# Altium PCB TK512_Optisk_Mottaker.PcbDoc
Units mm, origin at the board's own origin, x right, y up, seen from the top; angles counter-clockwise.
Board outline 41 x 28 mm, 2 copper layers (Top Layer, Bottom Layer); 19 components, 14 nets, 57 pads, 4 vias.
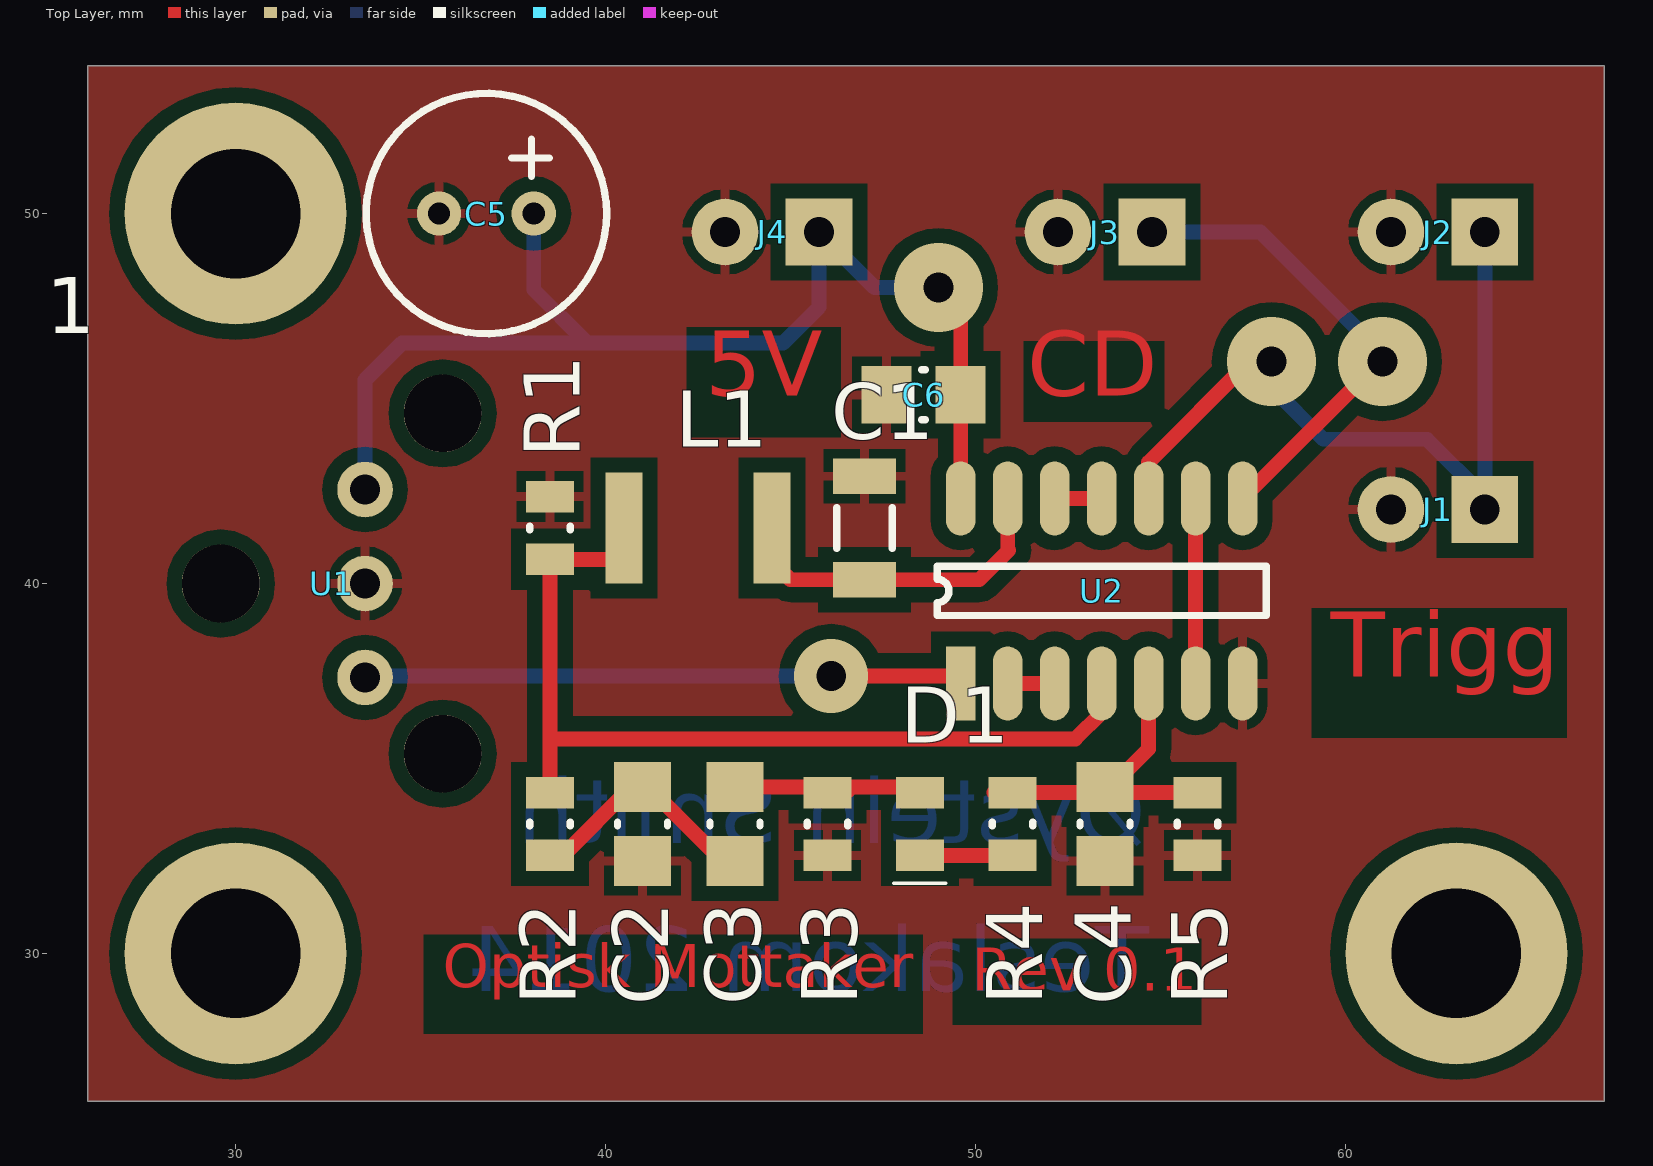
[diagram p0: Top Layer view]
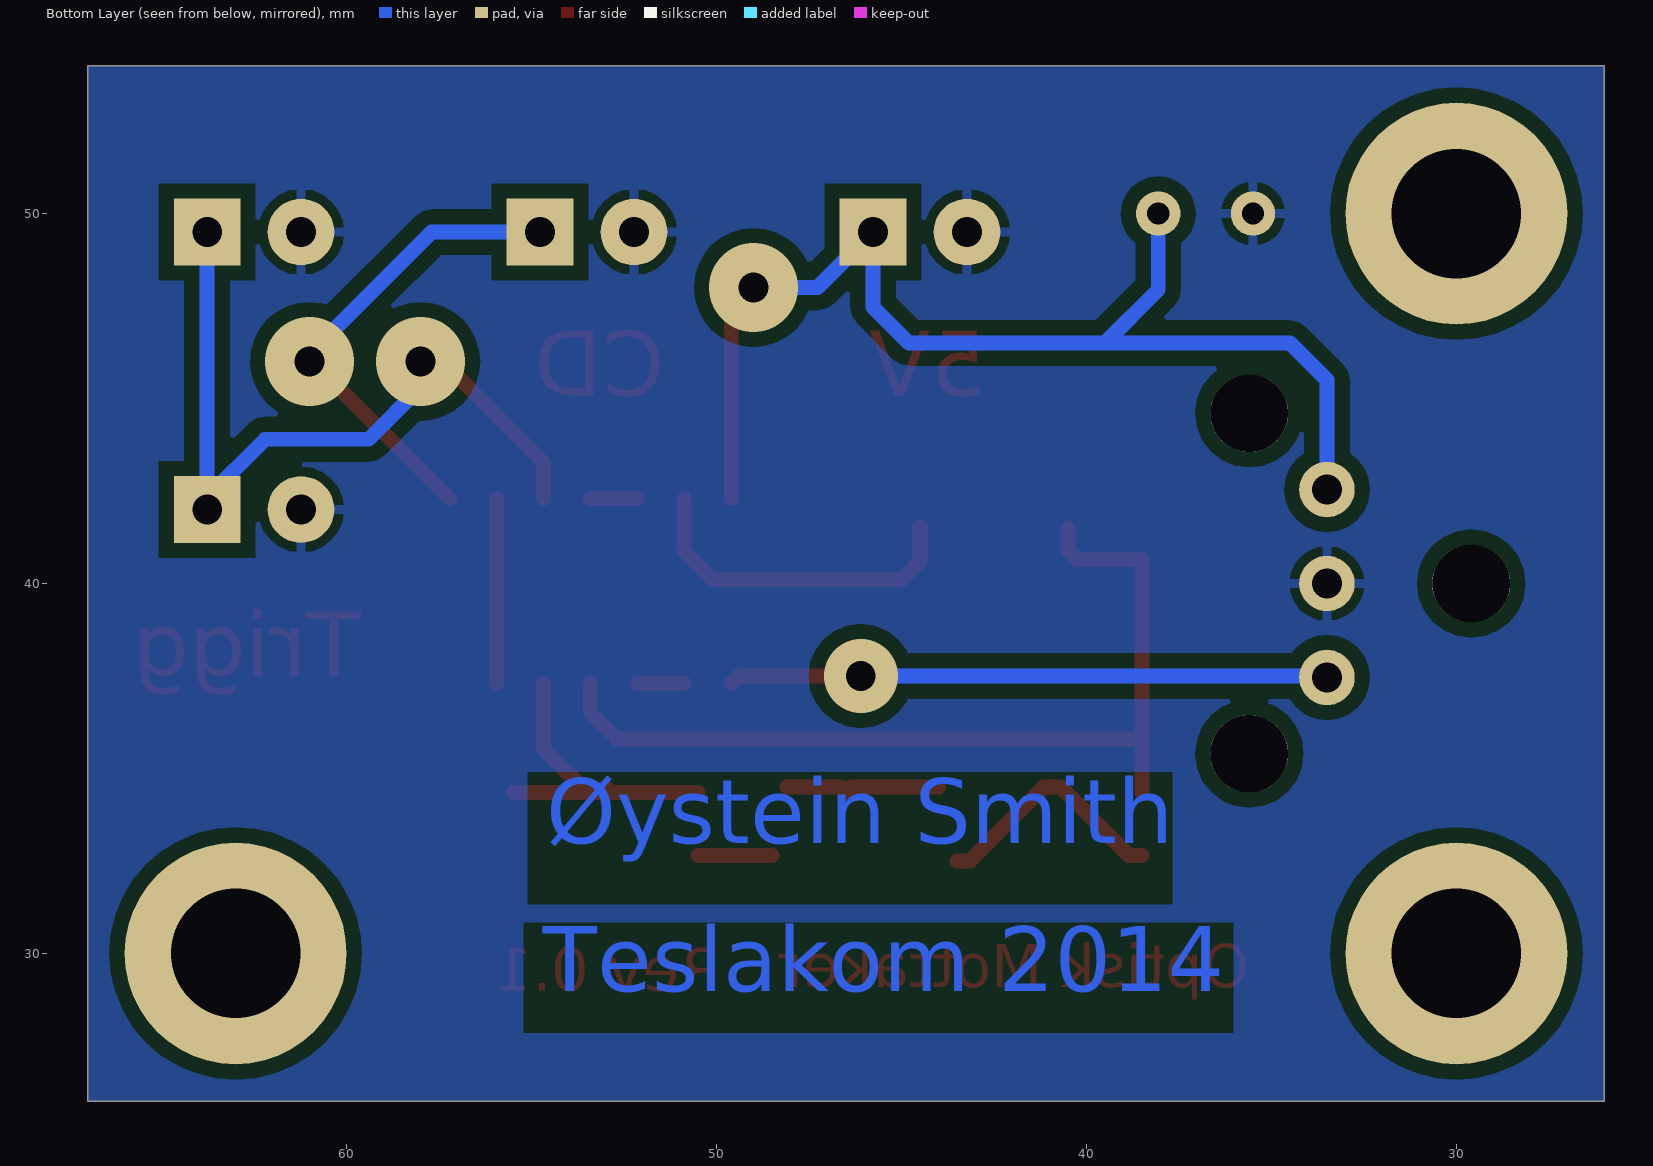
[diagram p1: Bottom Layer view, seen from below]

## Layer stack, top to bottom
Top Solder: solder mask 0.0102, Solder Resist, Dk 3.5
Top Layer: signal copper 0.0356
Dielectric1: dielectric 0.32, FR-4, Dk 4.8
Bottom Layer: signal copper 0.0356
Bottom Solder: solder mask 0.0102, Solder Resist, Dk 3.5

## Board outline
26,26 26,54 67,54 67,26

## Design rules (kind name [scope] priority, off if disabled: settings)
Clearance Clearance_Text [IsText] p1: gap=0
Clearance Clearance_Poly [All vs InPolygon] p2: gap=0.4
Clearance [All] p3: gap=0.25
PolygonConnect [All] p1: connectstyle=Relief reliefconductorwidth=0.254 reliefentries=4 polygonreliefangle="90 Angle" airgapwidth=0.254
RoutingVias [All] p1: holewidth=0.8 width=2.4 viastyle="Through Hole" minholewidth=0.8 minwidth=2.4 maxholewidth=0.8 maxwidth=3
SolderMaskExpansion [All] p1: expansion=0.102
UnpouredPolygon [All] p1: allowunpoured=FALSE
Width [All] p1: maxlimit=5 minlimit=0.4 preferedwidth=0.4
29 further rules are at their usual default settings.

## Components (designator, comment, footprint, x,y, rotation, side; value= is the part's Value field where it differs from the comment)
C1 "CAP 10uF 25V 1206(3216)" CAPC1206(3216)190_L 47,41.5 r270 top
C2 "CAP 100nF 25V 0805(2012)" CAPC0805(2012)145_M 41,33.5 r90 top
C3 "CAP 100nF 25V 0805(2012)" CAPC0805(2012)145_M 43.5,33.5 r270 top
C4 "CAP 100nF 25V 0805(2012)" CAPC0805(2012)145_M 53.5,33.5 r90 top
C5 "CAP" "CAP 2.5mm" 35.5,50 r0 top
C6 "CAP 100nF 25V 0805(2012)" CAPC0805(2012)145_M 48.6,45.1 r0 top
D1 "1N4148" 1N4148 48.5,33.5 r270 top
J1 "JST 2pin" "JST 2pin" 62.5,42 r90 top
J2 "JST 2pin" "JST 2pin" 62.5,49.5 r90 top
J3 "JST 2pin" "JST 2pin" 53.5,49.5 r90 top
J4 "JST 2pin" "JST 2pin" 44.5,49.5 r90 top
L1 "L" SMD4mm 42.5,41.5 r0 top
R1 "330R 5% 0805(2012)" RESC0805(2012)_L 38.5,41.5 r90 top
R2 "330R 5% 0805(2012)" RESC0805(2012)_L 38.5,33.5 r270 top
R3 "330R 5% 0805(2012)" RESC0805(2012)_L 46,33.5 r90 top
R4 "330R 5% 0805(2012)" RESC0805(2012)_L 51,33.5 r90 top
R5 "330R 5% 0805(2012)" RESC0805(2012)_L 56,33.5 r90 top
U1 "Optical Reciever" GP1FAV50TK 33.5,40 r180 top
U2 "74HC14" SOP14 49.6,37.3 r90 top

## Footprints (in the part's own frame and the unit in brackets; to place one, negate y for a bottom-side part, rotate by r counter-clockwise, add the part's x,y. Pads: shape width x height; smd on the part's side, far side on the other; paste and mask are expansions set on the pad)
1N4148 [mm]
  rect 0.85x1.3 smd: A(-0.85,0) K(0.85,0)
  silkscreen extent 1.6,-0.7 1.6,0.7, body extent -1.1,-0.67 1.1,0.68, height 0.7
"CAP 2.5mm" [mm]
  round 1.2 hole 0.6: 1(0,0) 2(2.56,0)
  silkscreen extent -1.97,-3.25 4.53,3.25
CAPC0805(2012)145_M [mm] "Chip Capacitor, Body 2.0x1.2mm, Height 1.45mm, IPC Low Density"
  rect 1.35x1.55 smd: 1(-1,0) 2(1,0)
  silkscreen extent -0.05,-0.67 0.05,0.67, body extent -1.1,-0.72 1.1,0.72, height 1.45
CAPC1206(3216)190_L [mm] "Chip Capacitor, Body 3.2x1.6mm, Height 1.9mm, IPC High Density"
  rect 0.95x1.7 smd: 1(-1.4,0) 2(1.4,0)
  silkscreen extent -0.55,-0.75 0.55,0.75, body extent -1.7,-0.9 1.7,0.9, height 1.9
GP1FAV50TK [mm] "TOSLINK Transmitter 660nm"
  round 1.5 hole 0.8: 1(0,-2.54) 2(0,0) 3(0,2.54)
  round 2.1 hole 2.1: 4(-2.1,4.6) 4(-2.1,-4.6) 4(3.9,0)
  body extent -3.6,-6 10.4,6, height 19.02
"JST 2pin" [mm]
  rect 1.8x1.8 hole 0.8: 1(0,-1.27)
  round 1.8 hole 0.8: 2(0,1.27)
  body extent -2.37,-3.7 3.38,3.7, height 7
RESC0805(2012)_L [mm] "Chip Resistor, Body 2.0x1.3mm, IPC High Density"
  rect 0.85x1.3 smd: 1(-0.85,0) 2(0.85,0)
  silkscreen extent -0.05,-0.55 0.05,0.55, body extent -1.1,-0.67 1.1,0.68, height 0.7
SMD4mm [mm]
  rect 1x3 smd: 1(-2,0) 2(2,0)
SOP14 [mm]
  rect 2x0.8 smd: 1(0,0)
  oval 2x0.8 smd: 2(0,-1.27) 3(0,-2.54) 4(0,-3.81) 5(0,-5.08) 6(0,-6.35) 7(0,-7.62) 8(5,-7.62) 9(5,-6.35) 10(5,-5.08) 11(5,-3.81) 12(5,-2.54) 13(5,-1.27) 14(5,0)
  silkscreen extent 1.84,-8.25 3.17,0.64

## Part data
C1: library part CMP-1037-04979-1, "CAP 10uF 25V ±10% 1206 (3216 Metric) Thickness 1.9mm SMD"
C2 C3 C4 C6: library part CMP-1036-04408-1, "CAP 100nF 25V ±5% 0805 (2012 Metric) Thickness 1.45mm SMD"
R1 R2 R3 R4 R5: library part CMP-1013-00062-1, "330R 0.125W 5% 0805 (2012 Metric)  SMD"
U1: library part "Otical Reciever"

## Free pads (board coordinates)
  round 6 hole 3.5: 0(63,30) 2(30,50) 3(30,30)

## Via types
v1: diameter 2.4, hole 0.8, Top Layer to Bottom Layer, 3 vias
v2: diameter 2, hole 0.8, Top Layer to Bottom Layer, 1 vias

## Nets (pads, with @x,y where several pads share a name; then routed paths per layer and width w, separated by ;. In a path a pad name is that pad's centre, name@x,y a point inside that pad or via, vN(x,y) a via of type N, cw(c..) or ccw(c..) an arc to the next point about the centre after c; other vN are vias at no path point)
+5: C5.2 C6.2 J4.1 U1.1 U2.14 | length 32
  Top Layer w0.4: v1(49,48) 49.6,47.4 C6.2 U2.14
  Bottom Layer w0.4: U1.1 33.5,45.5 34.5,46.5 39.5,46.5 ; C5.2 38.06,47.94 39.5,46.5 ; v1(49,48) 47.27,48 J4.1 45.77,47.47 44.8,46.5 39.5,46.5
GND: C1.1 C2.1 C4.1 C5.1 C6.1 J1.2 J2.2 J3.2 J4.2 R1.2 R3.1 R5.1 U1.2 U2.7
NetC1_2: C1.2 L1.2 U2.13 | length 9.3
  Top Layer w0.4: L1.2 44.5,40.6 45,40.1 C1.2 50.1,40.1 50.9,40.9 50.87,40.93 U2.13
NetC2_2: C2.2 C3.2 R2.2 | length 6.6
  Top Layer w0.4: R2.2 38.85,32.65 40.7,34.5 C2.2 41.15,34.5 43.15,32.5 C3.2
NetC3_1: C3.1 D1.A R3.2 | length 4.2
  Top Layer w0.4: C3.1@44,34.5 46.35,34.5 46.5,34.35 46.65,34.5 D1.A@48.1,34.5
NetC4_2: C4.2 R4.2 R5.2 U2.5 | length 8.6
  Top Layer w0.4: R4.2@50.5,34.35 52.85,34.35 53,34.5 53.15,34.35 C4.2@53.5,34.35 ; U2.5 54.68,35.53 C4.2@53.5,34.35 ; R5.2@55.5,34.35 C4.2@53.5,34.35
NetD1_K: D1.K R4.1 | length 2
  Top Layer w0.4: D1.K R4.1@50.5,32.65
NetJ1_1: J1.1 J2.1 U2.10 | length 20.6
  Top Layer w0.4: U2.10 54.68,43.28 57.4,46 v1(58,46)
  Bottom Layer w0.4: v1(58,46) 58,45.3 59.4,43.9 62.2,43.9 J1.1@63.77,42.33 ; J1.1 J1.1@63.77,42.33 ; J2.1 J1.1@63.77,42.33
NetJ3_1: J3.1 U2.8 | length 13.5
  Top Layer w0.4: U2.8 61,46.08 61,46.2 v1(61,46)
  Bottom Layer w0.4: J3.1 57.7,49.5 61,46.2 v1(61,46)
NetL1_1: L1.1 R1.1 R2.1 U2.4 | length 25
  Top Layer w0.4: R2.1 38.5,35.7 ; L1.1 40.5,40.9 40.25,40.65 R1.1 38.5,35.7 ; U2.4 53.41,36.51 52.7,35.8 38.6,35.8 38.5,35.7
NetU1_3: U1.3 U2.1 | length 16.2
  Top Layer w0.4: v2(46.1,37.5) 49.4,37.5 U2.1
  Bottom Layer w0.4: U1.3@33.5,37.5 v2(46.1,37.5)
NetU2_2: U2.2 U2.3 | length 1.3
  Top Layer w0.4: U2.2 U2.3
NetU2_6: U2.6 U2.9 | length 5
  Top Layer w0.4: U2.6 U2.9
NetU2_11: U2.11 U2.12 | length 1.3
  Top Layer w0.4: U2.12 U2.11
pads on no net: U1.4

## Polygon pours and split planes (outlines as drawn)
GND on Top Layer "B" (solid, pour order 2): 26,26 26,54 67,54 67,26 26,26
GND on Bottom Layer "B" (solid, pour order 4): 26,26 26,54 67,54 67,26 26,26

## Other copper
Top Layer:
  text "5V" at 42.7,44.5 h3
  text "CD" at 51.4,44.5 h3
  text "Trigg" at 59.6,36.9 h3
  text "Optisk Mottaker" at 35.6,28.7 h2
  text "Rev 0.1" at 49.9,28.6 h2
Bottom Layer:
  text "Øystein Smith" at 54.6,32.4 h3
  text "Teslakom 2014" at 54.7,28.4 h3